# EAGLE board MoveDetector_Board (EAGLE 9.6.2)
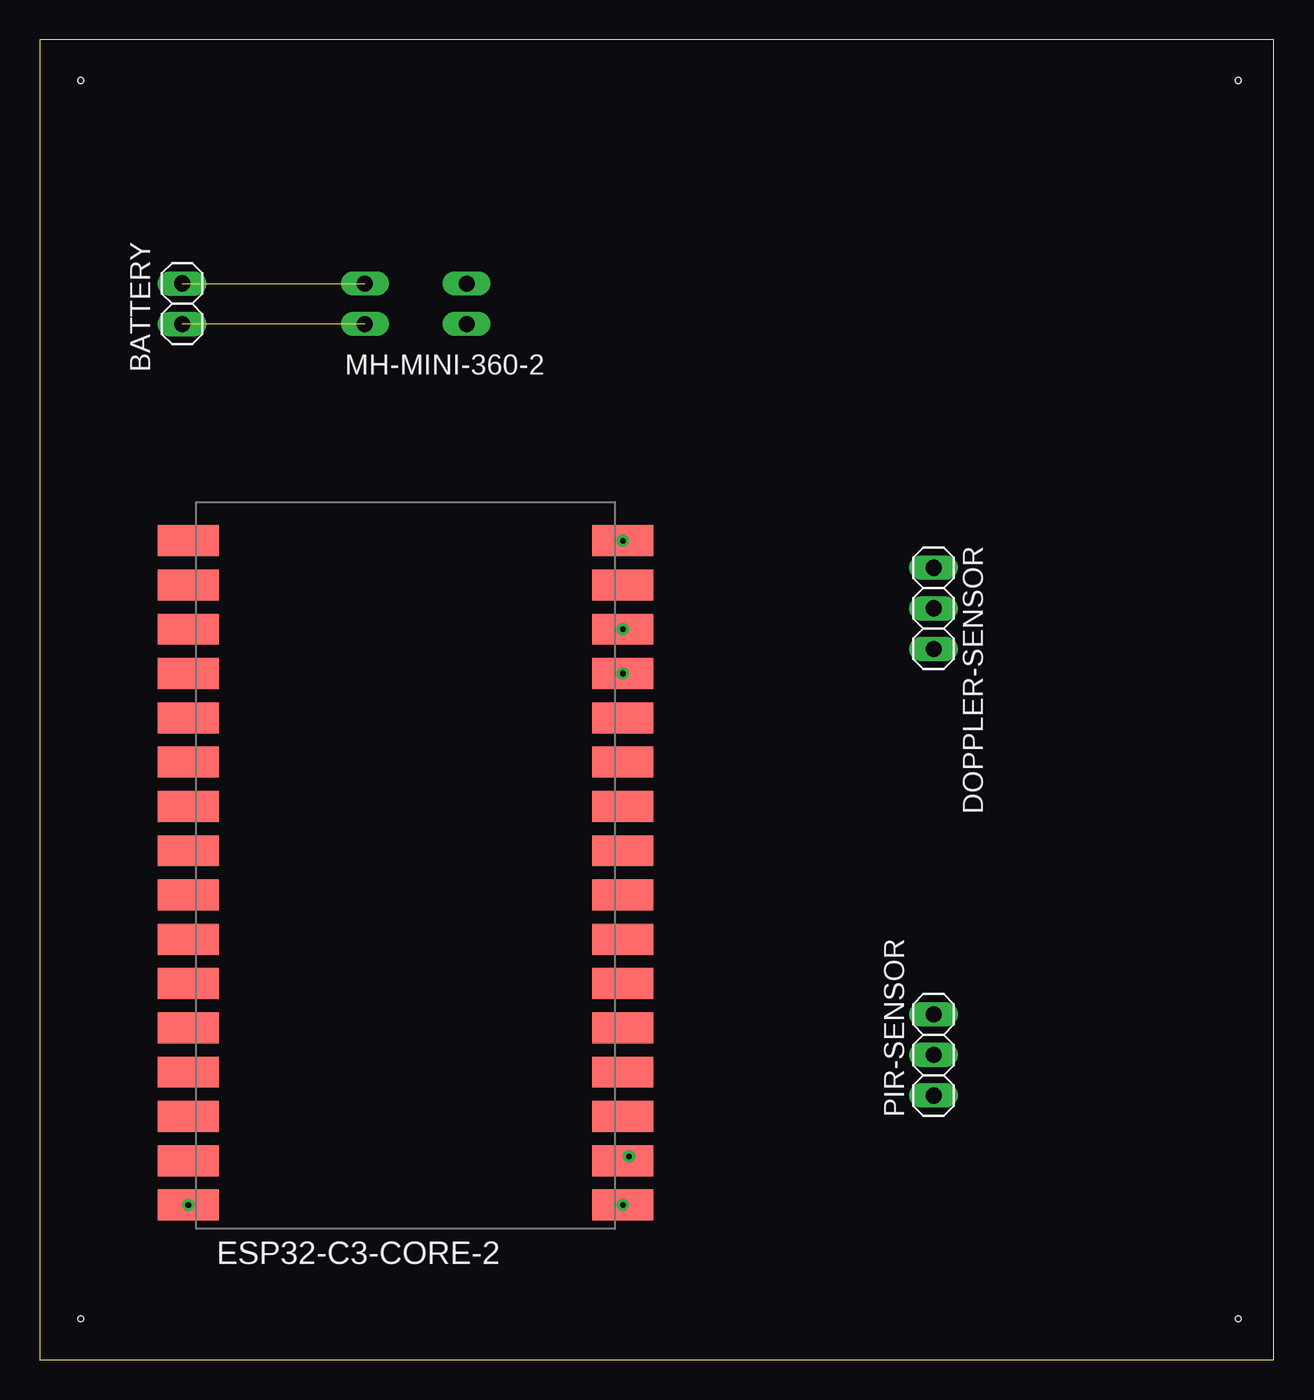
[diagram p0: board, top side]
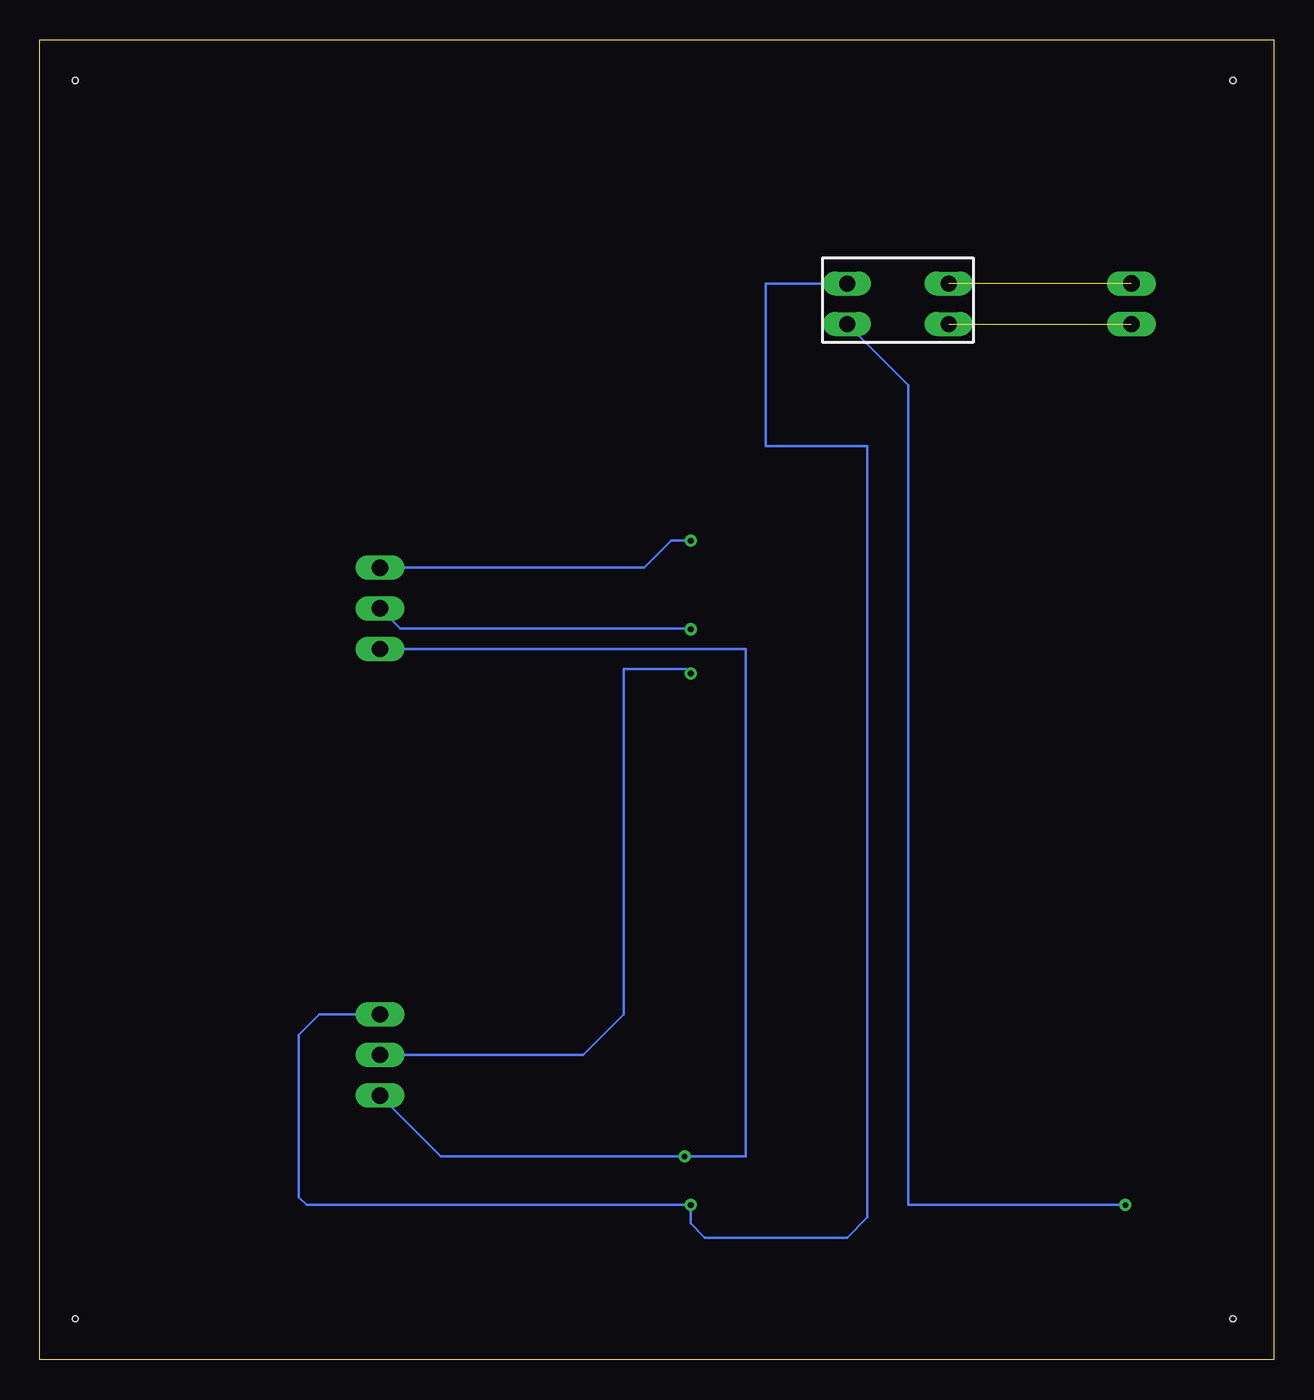
[diagram p1: board, bottom side, seen from below]

Size 77.14 x 82.54 mm. Coordinates in mm from the lower left corner, seen from the top.
Outline: 0,0 77.14,0 77.14,82.54 0,82.54 0,0
Copper layers (1*16): Top 0.035mm / dielectric 1.6mm / Bottom 0.035mm
Design rules "default *": minimum track width 6mil, minimum drill 0.35mm, track to track 6mil, track to pad 6mil, pad to pad 6mil, via to via 6mil, smd to smd 6mil, copper to edge 40mil, drill to drill 6mil, minimum pad ring 10mil, minimum via ring 8mil, stop-mask expansion 4mil, vias tented up to drill 0mil, thermal gap 10mil
Holes 0.35 mm at 2.54,2.54 2.54,80.01 74.93,80.01 74.93,2.54

## Footprints (pad centres in the part's own frame; a part is rotated, then mirrored left to right if it is on the bottom)
1X02 = drill 1.016 long: 1 -1.27,0; 2 1.27,0
1X03 = drill 1.016 long: 1 -2.54,0; 2 0,0; 3 2.54,0
ESP32-C3 = smd 3.81 x 1.93: 1 -6.73,23.28; 2 -6.73,20.51; 3 -6.73,17.74; 4 -6.73,14.97; 5 -6.73,12.2; 6 -6.73,9.43; 7 -6.73,6.66; 8 -6.73,3.89; 9 -6.73,1.12; 10 -6.73,-1.65; 11 -6.73,-4.42; 12 -6.73,-7.19; 13 -6.73,-9.96; 14 -6.73,-12.73; 15 -6.73,-15.5; 16 -6.73,-18.27; 17 -33.91,23.28; 18 -33.91,20.51; 19 -33.91,17.74; 20 -33.91,14.97; 21 -33.91,12.2; 22 -33.91,9.43; 23 -33.91,6.66; 24 -33.91,3.89; 25 -33.91,1.12; 26 -33.91,-1.65; 27 -33.91,-4.42; 28 -33.91,-7.19; 29 -33.91,-9.96; 30 -33.91,-12.73; 31 -33.91,-15.5; 32 -33.91,-18.27
MH-MINI-360 = drill 1 long: IN+ -3.81,-2.54; IN- -3.81,0; OUT+ -10.16,-2.54; OUT- -10.16,0

## Placement (x,y rotation side)
BATTERY  [1X02]  8.89,66.04 270 top
DOPPLER-SENSOR  [1X03]  55.88,46.99 270 top
ESP32-C3-CORE-2  ESP32-C3  [ESP32-C3]  43.18,27.94 0 top
MH-MINI-360-2  MH-MINI-360  [MH-MINI-360]  16.51,67.31 0 bottom
PIR-SENSOR  [1X03]  55.88,19.05 90 top

## Library data of the parts
BATTERY DOPPLER-SENSOR PIR-SENSOR = pinhead
ESP32-C3-CORE-2 MH-MINI-360-2 = Library_Agata.Sobczyk

## Nets
N$4: ESP32-C3-CORE-2.32 MH-MINI-360-2.OUT+
N$5: ESP32-C3-CORE-2.16 MH-MINI-360-2.OUT- PIR-SENSOR.3
N$6: DOPPLER-SENSOR.3 ESP32-C3-CORE-2.15 PIR-SENSOR.1
N$8: ESP32-C3-CORE-2.4 PIR-SENSOR.2
N$11: DOPPLER-SENSOR.2 ESP32-C3-CORE-2.3
N$12: DOPPLER-SENSOR.1 ESP32-C3-CORE-2.1
N$13: BATTERY.1 MH-MINI-360-2.IN-
N$15: BATTERY.2 MH-MINI-360-2.IN+

## Tracks (layer width: path | path; a pad name or v marks a point on that pad's centre or on a via)
N$4  (via drill 0.35)
  Bottom 0.152: ESP32-C3-CORE-2.32 22.86,9.67 22.86,60.96 MH-MINI-360-2.OUT+
  other vias: 9.27,9.67
N$5  (via drill 0.35)
  Bottom 0.152: MH-MINI-360-2.OUT- 31.75,67.31 31.75,57.15 25.4,57.15 25.4,8.89 26.67,7.62 35.56,7.62 36.45,8.51 ESP32-C3-CORE-2.16 60.47,9.67 60.96,10.16 60.96,20.32 59.69,21.59 PIR-SENSOR.3
  other vias: 36.45,9.67
N$6  (via drill 0.35)
  Top 0.152: ESP32-C3-CORE-2.15 36.71,12.7 v36.83,12.7
  Bottom 0.152: PIR-SENSOR.1 52.07,12.7 v36.83,12.7 33.02,12.7 33.02,44.45 DOPPLER-SENSOR.3
N$8  (via drill 0.35)
  Bottom 0.152: PIR-SENSOR.2 43.18,19.05 40.64,21.59 40.64,43.18 36.72,43.18 ESP32-C3-CORE-2.4
  other vias: 36.45,42.91
N$11  (via drill 0.35)
  Bottom 0.152: ESP32-C3-CORE-2.3 36.49,45.72 54.61,45.72 DOPPLER-SENSOR.2
  other vias: 36.45,45.68
N$12  (via drill 0.35)
  Bottom 0.152: ESP32-C3-CORE-2.1 37.68,51.22 39.37,49.53 DOPPLER-SENSOR.1
  other vias: 36.45,51.22
N$13  (1 unrouted)
N$15  (1 unrouted)